# Altium PCB TX_custom.PcbDoc (part 1 of 2)
Units mil, origin at the board's own origin, x right, y up, seen from the top; angles counter-clockwise.
Board outline 2165.35 x 2559.06 mil, 4 copper layers (Top Layer, Signal Layer 1, Internal Plane 1, Bottom Layer), stack 60.752 mil thick; 202 components, 136 nets, 640 pads, 248 vias.
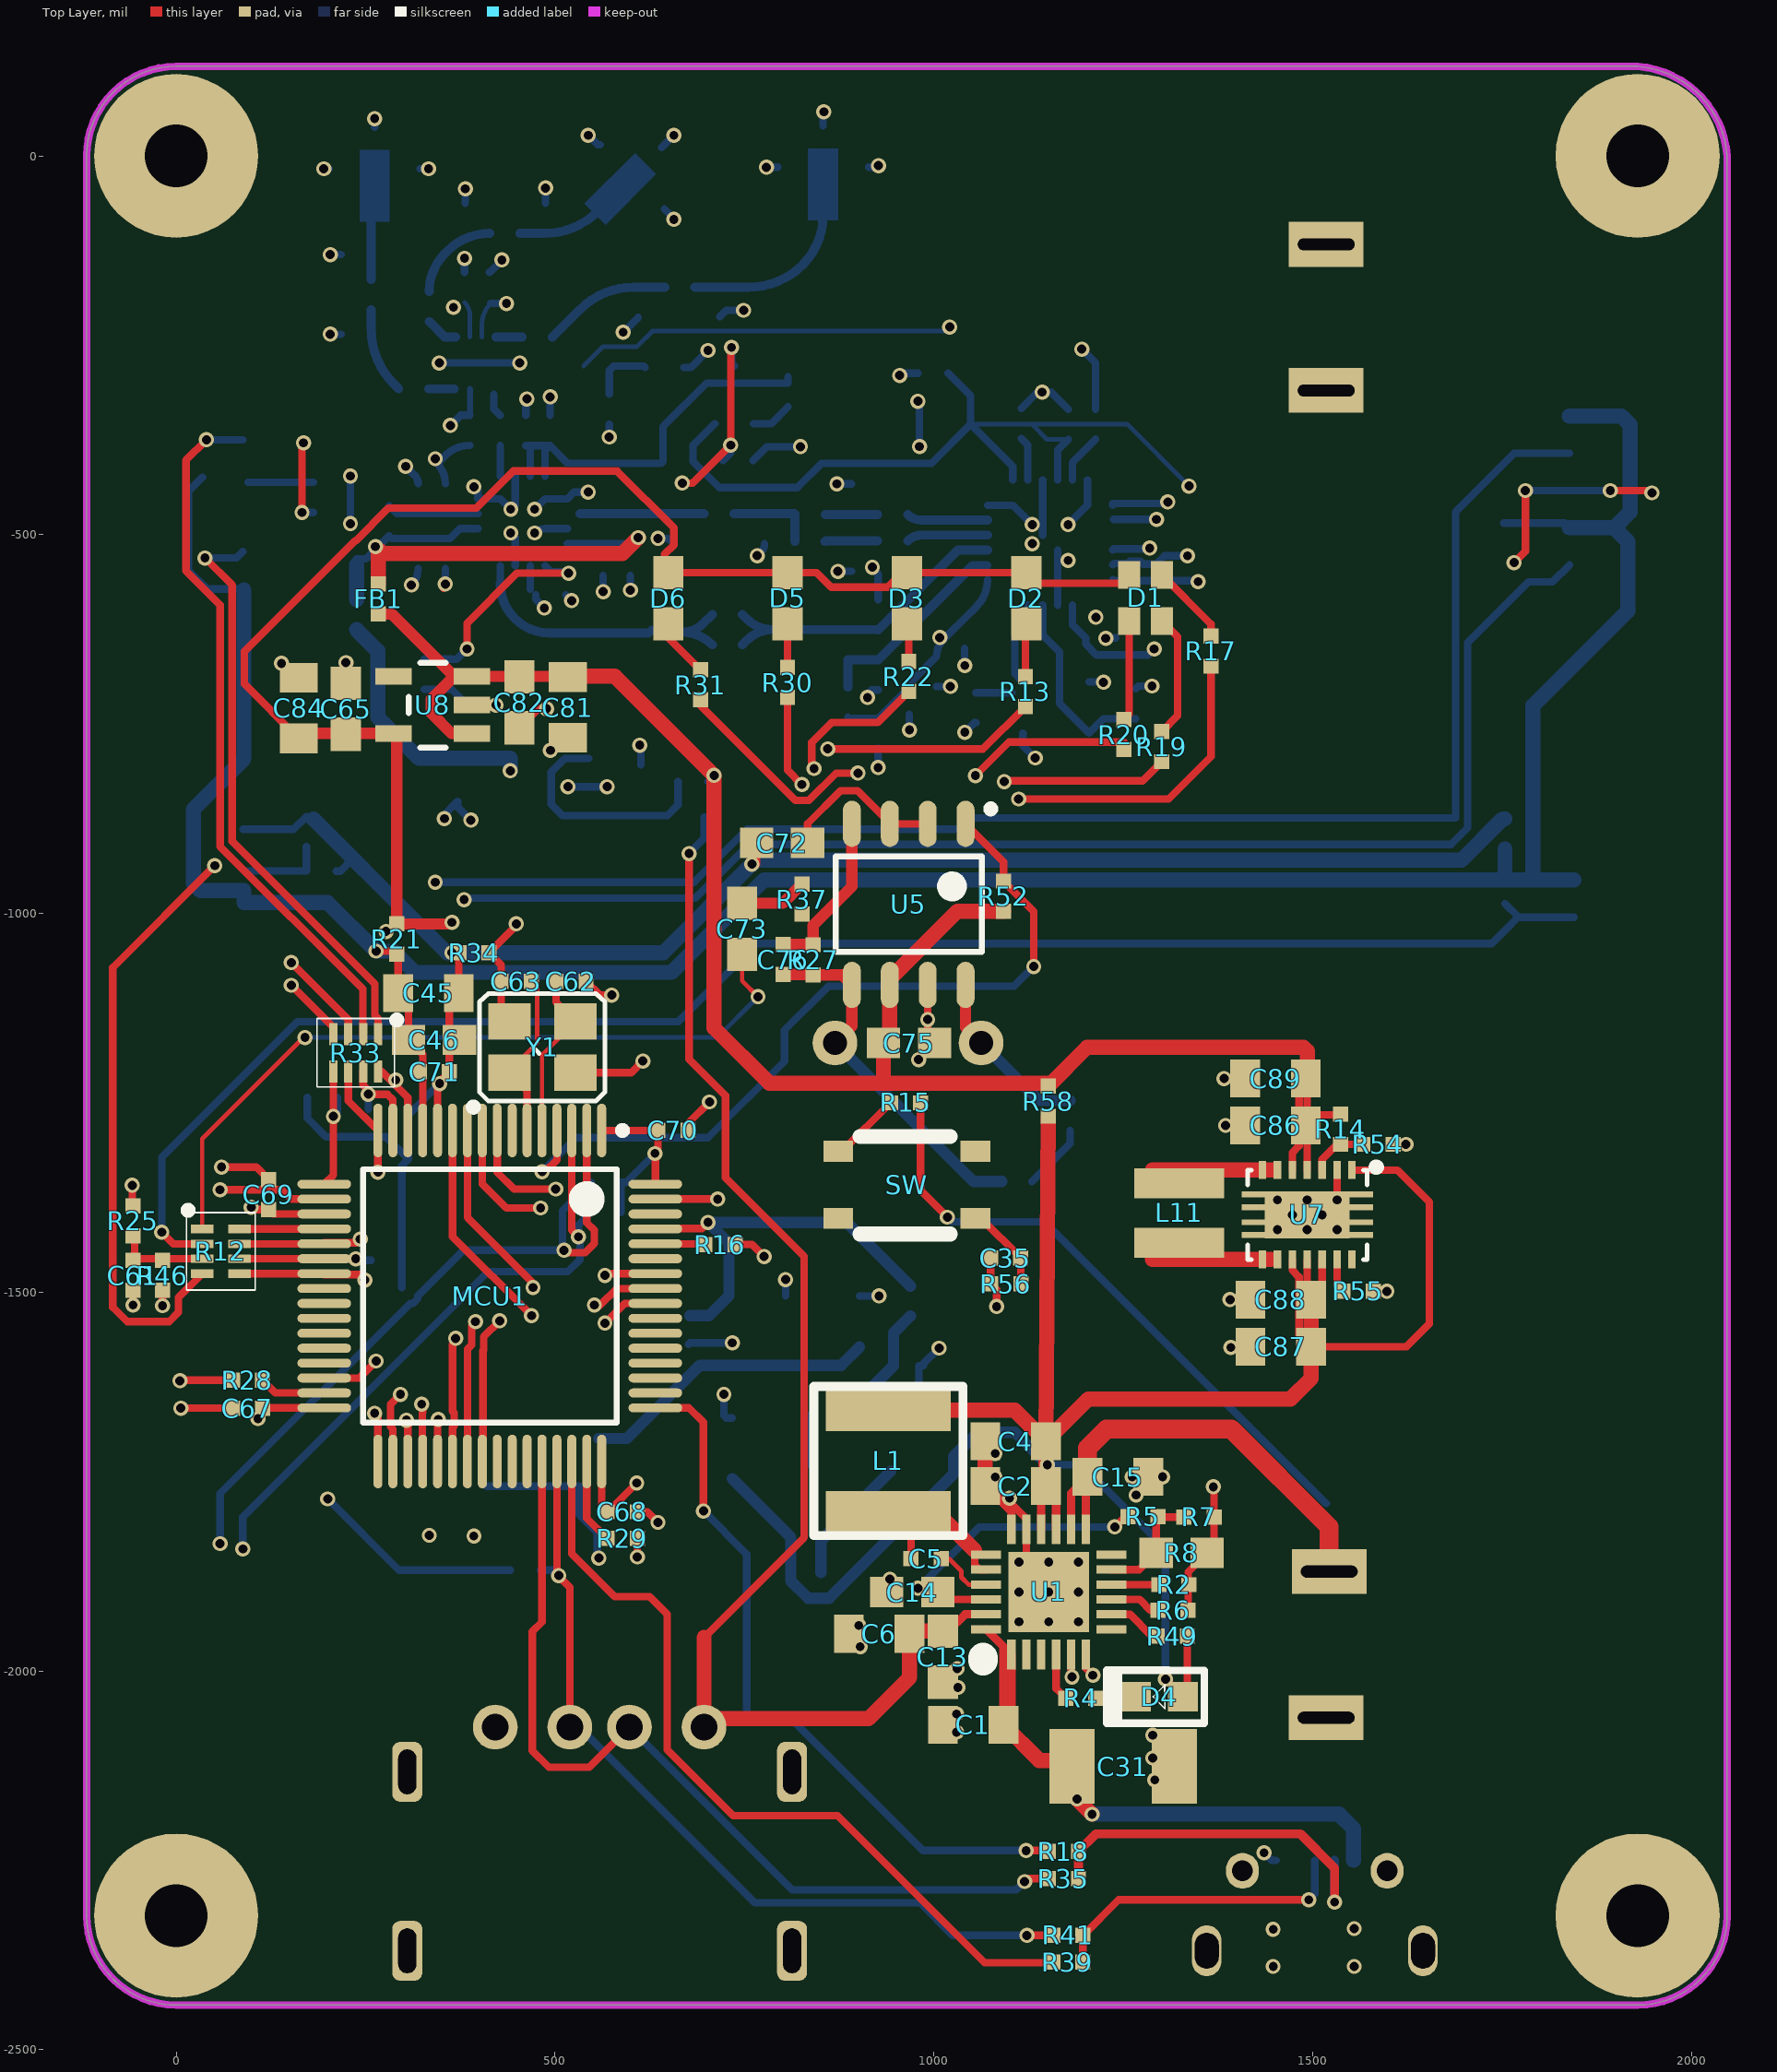
[diagram p0: Top Layer view]
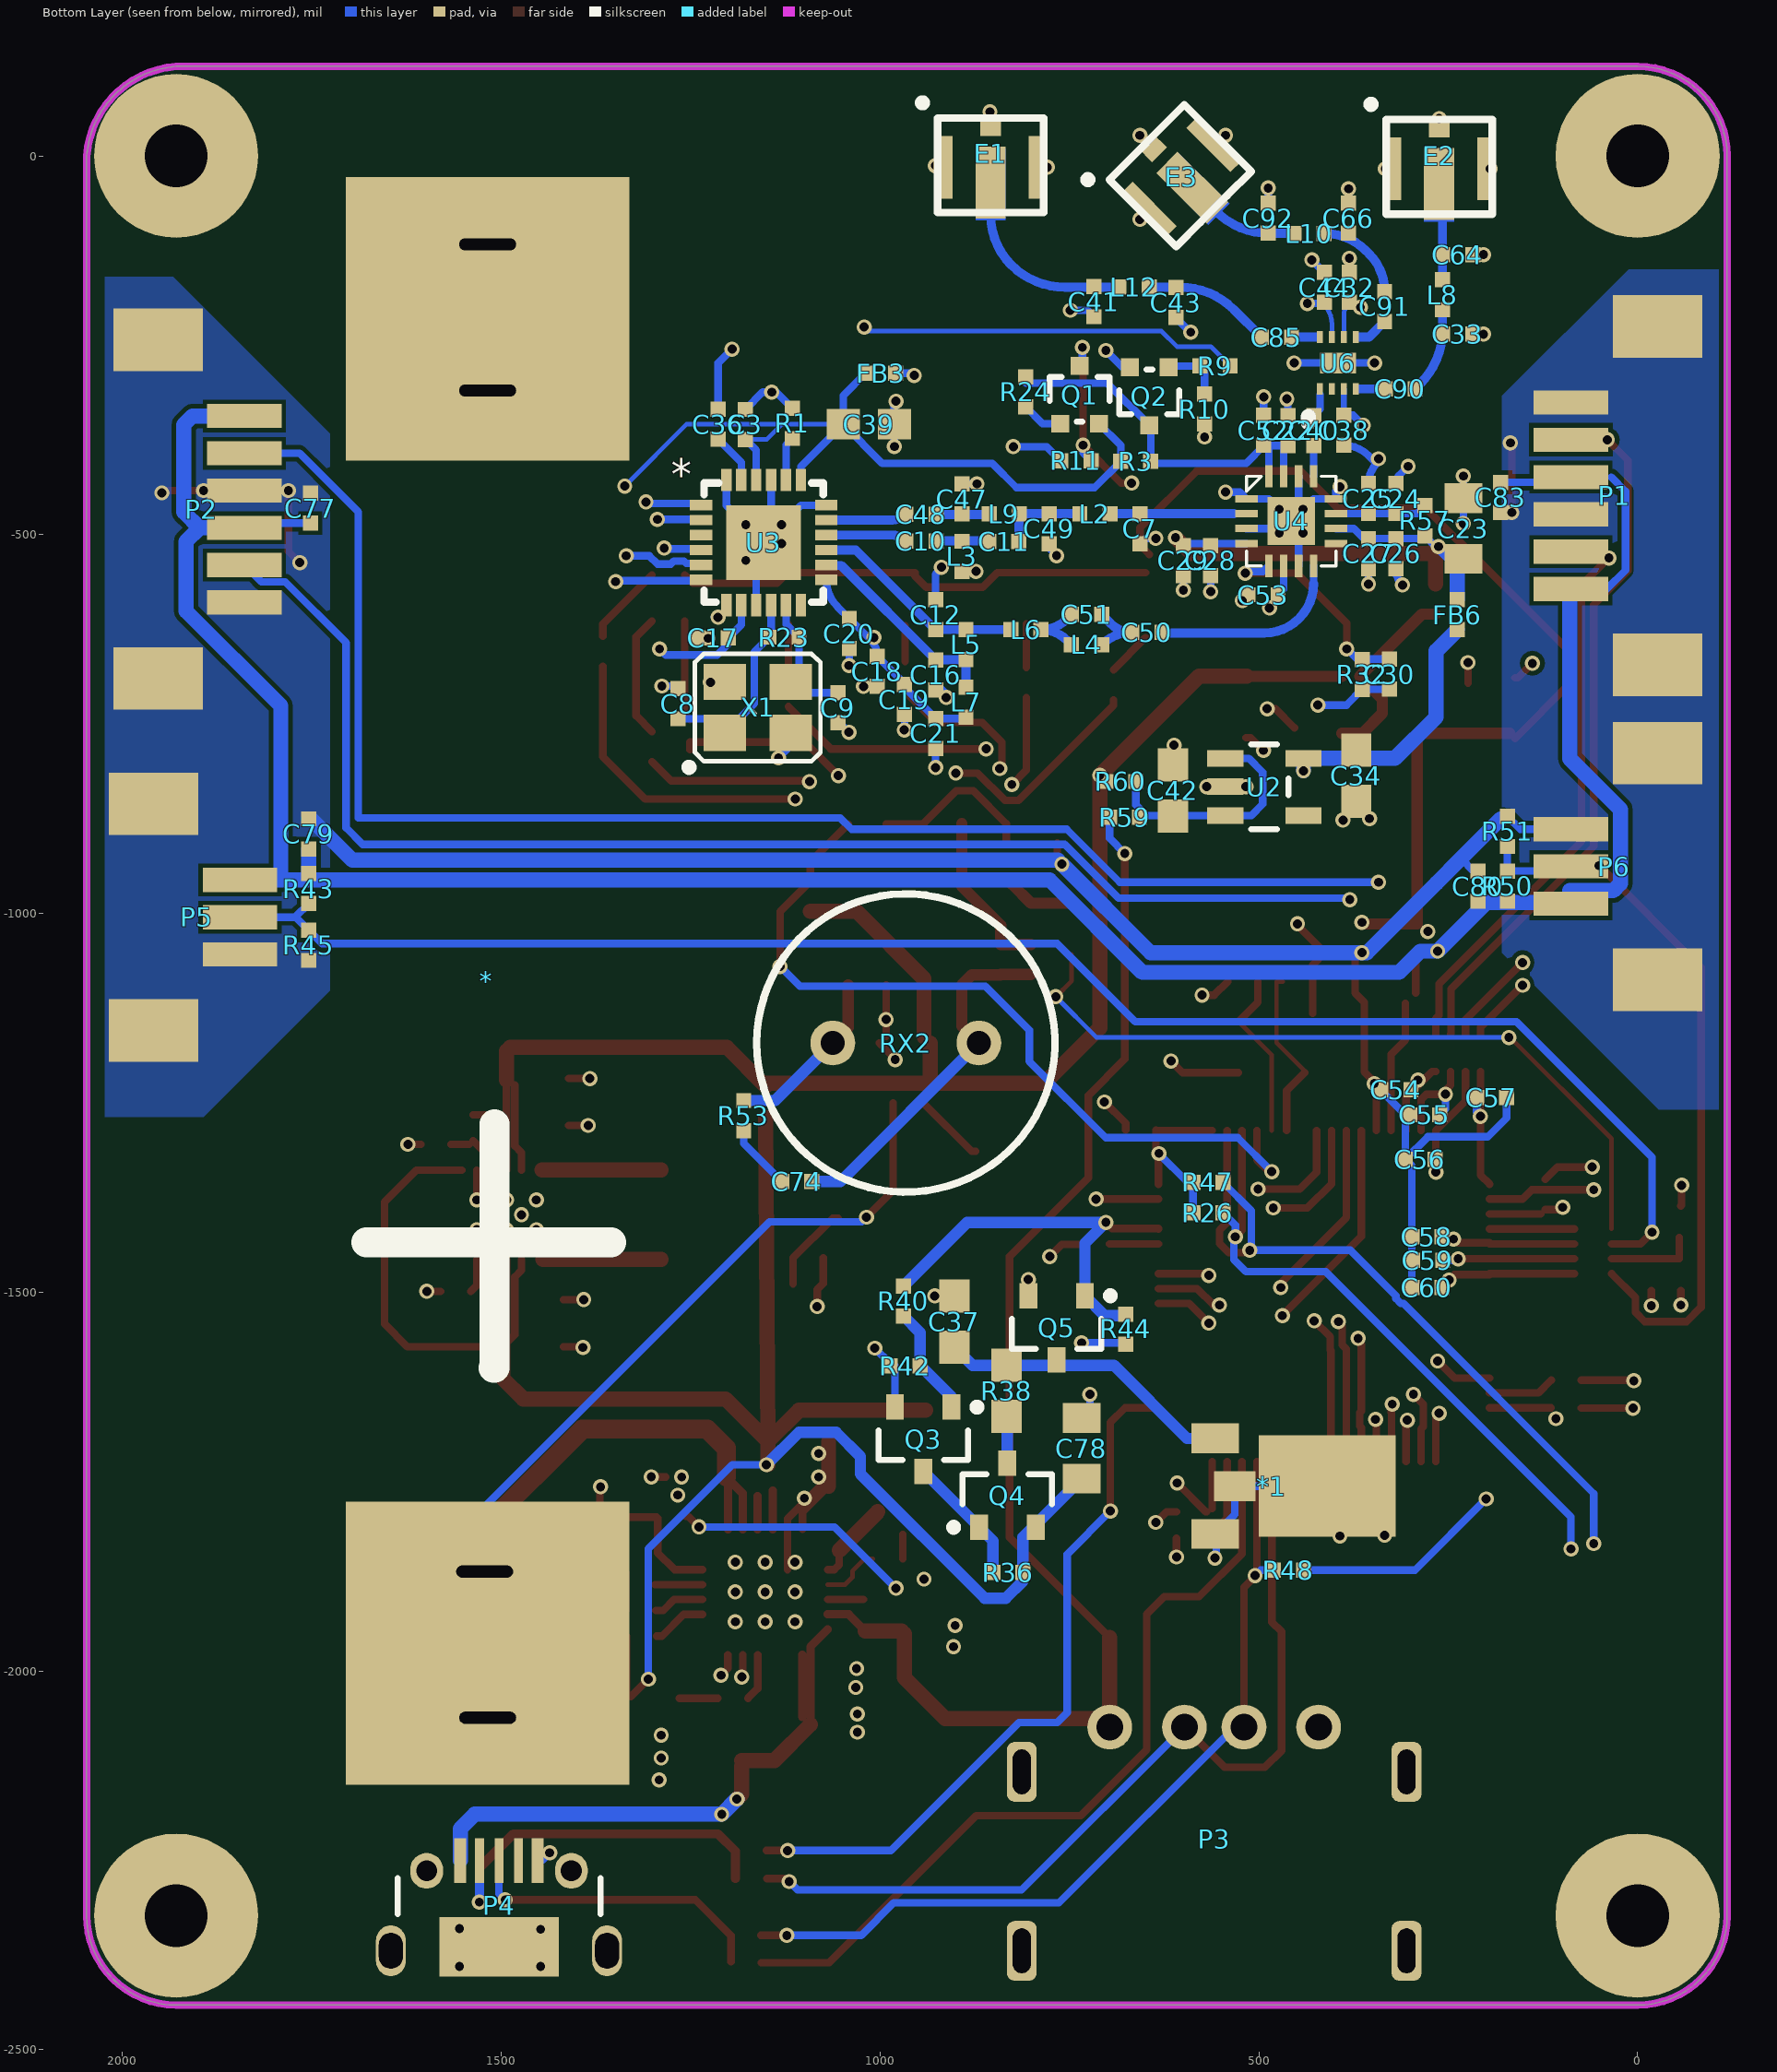
[diagram p1: Bottom Layer view, seen from below]
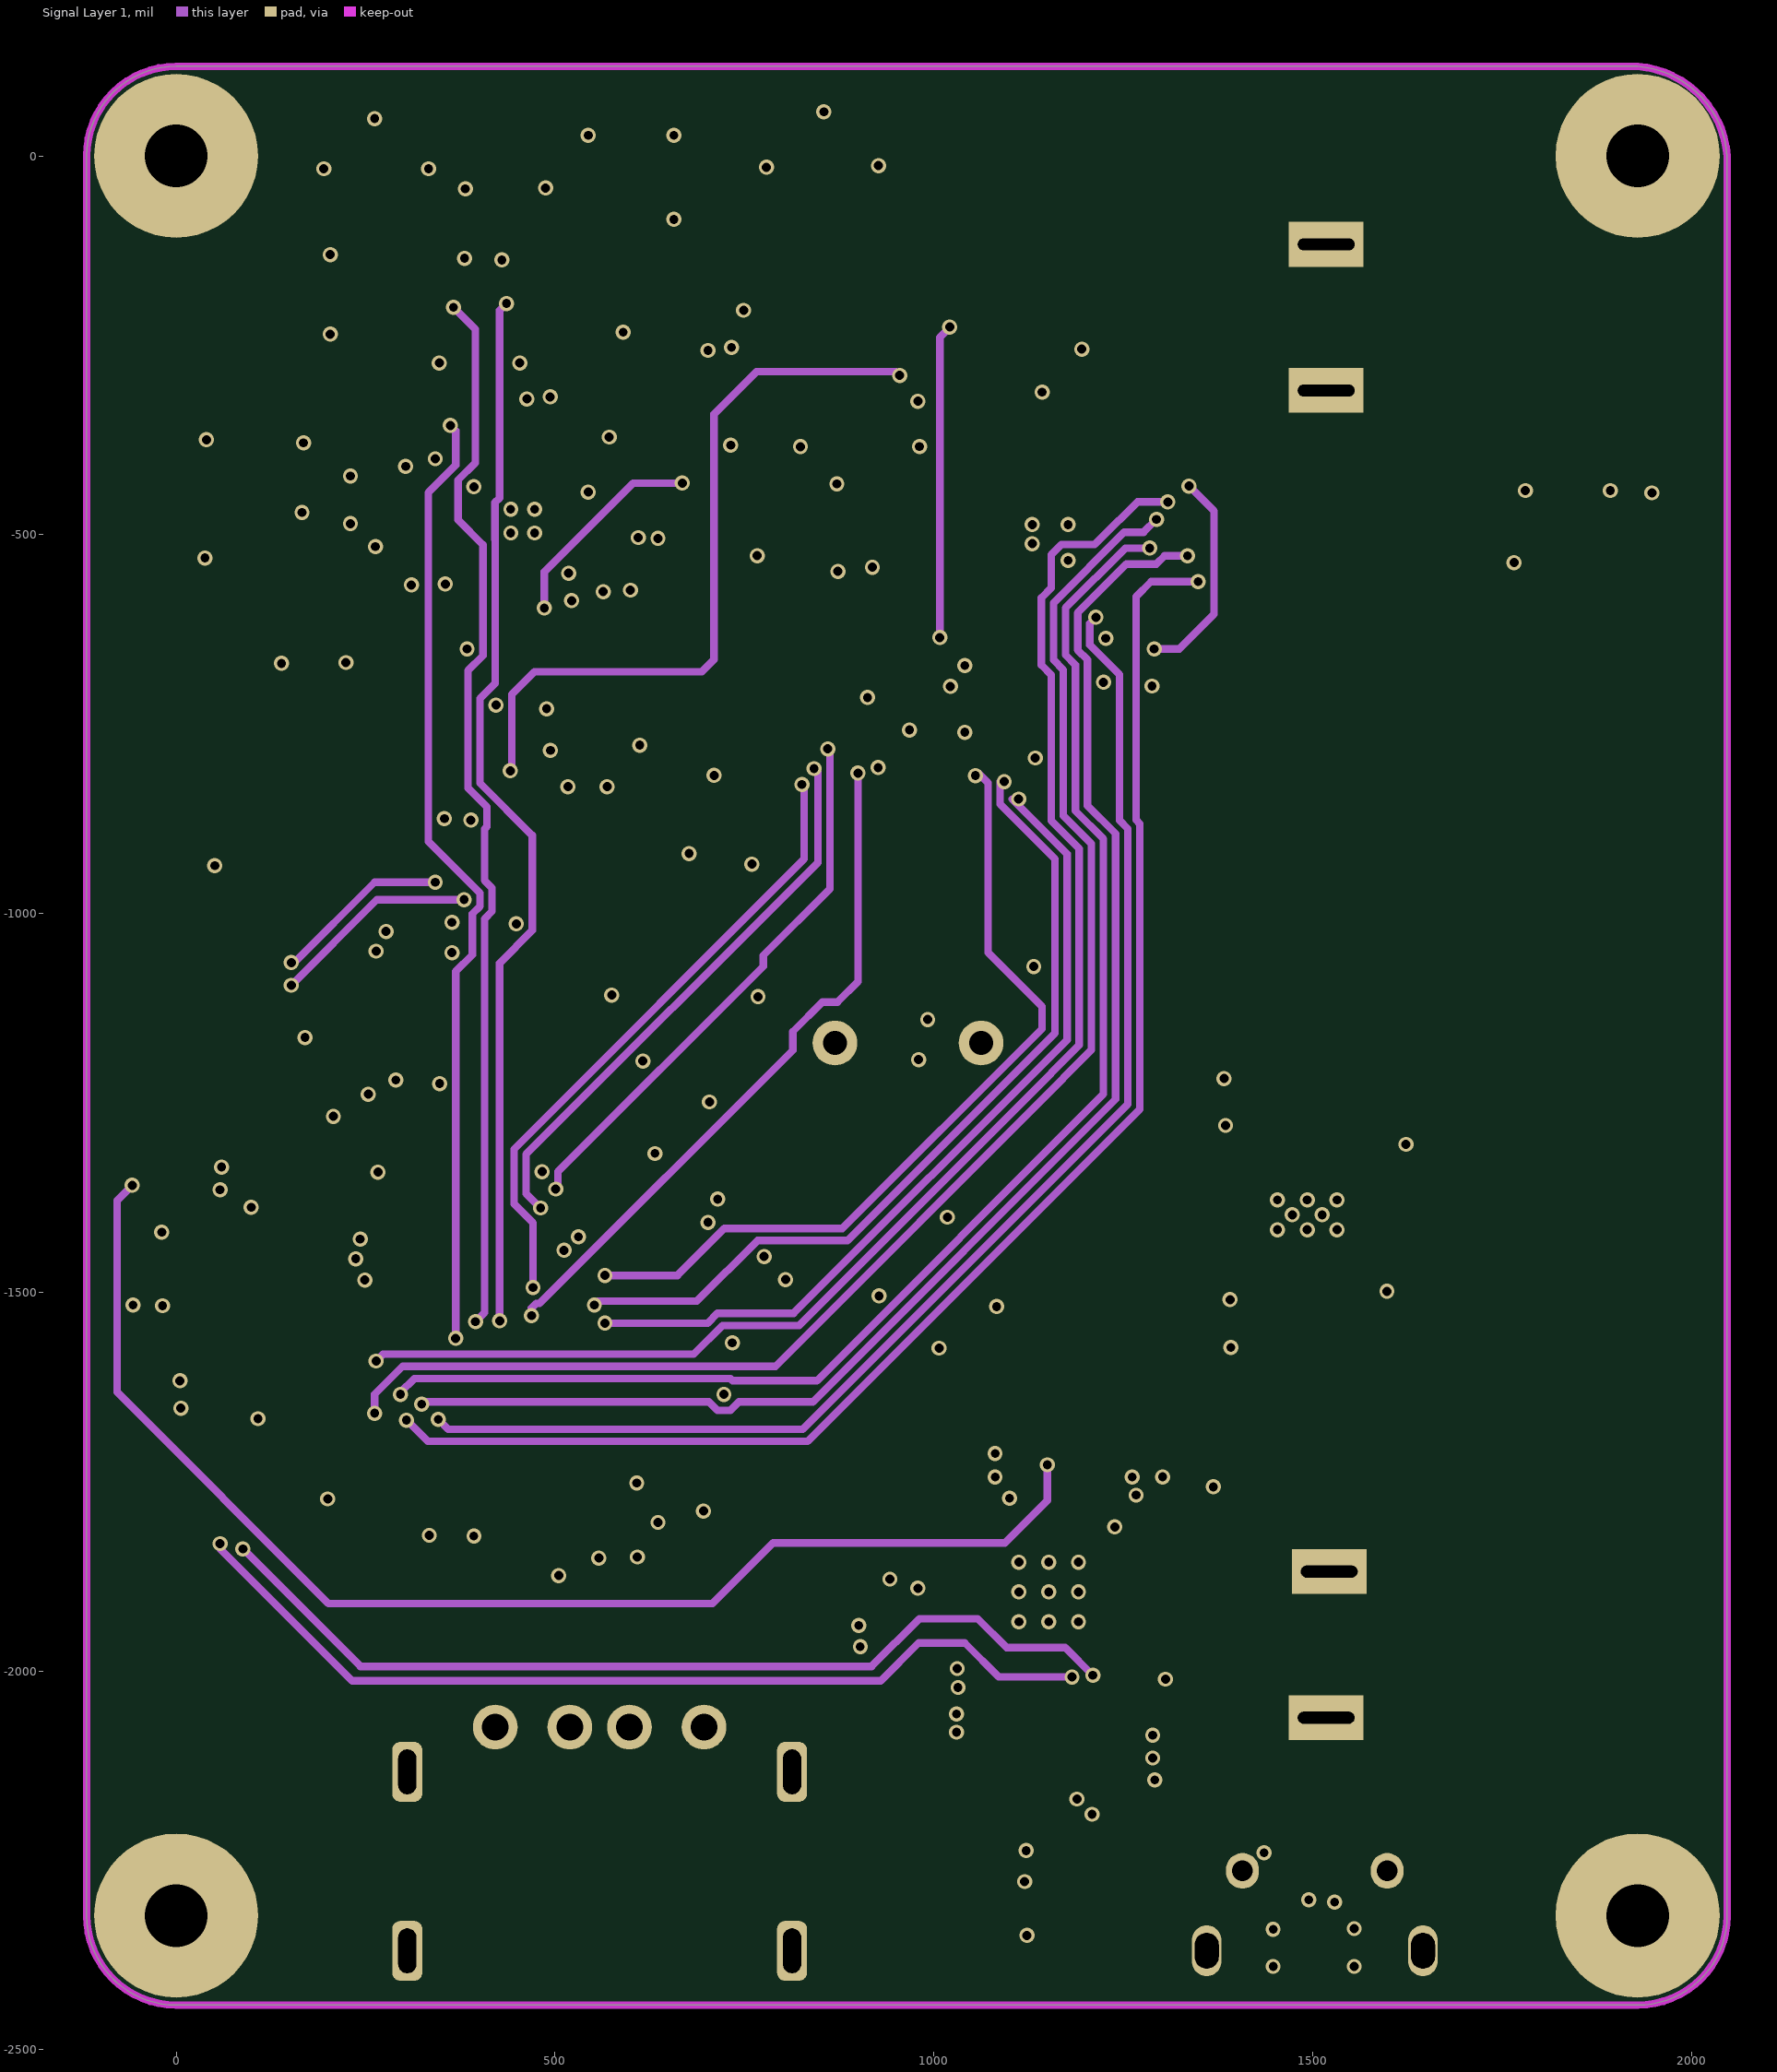
[diagram p2: Signal Layer 1]
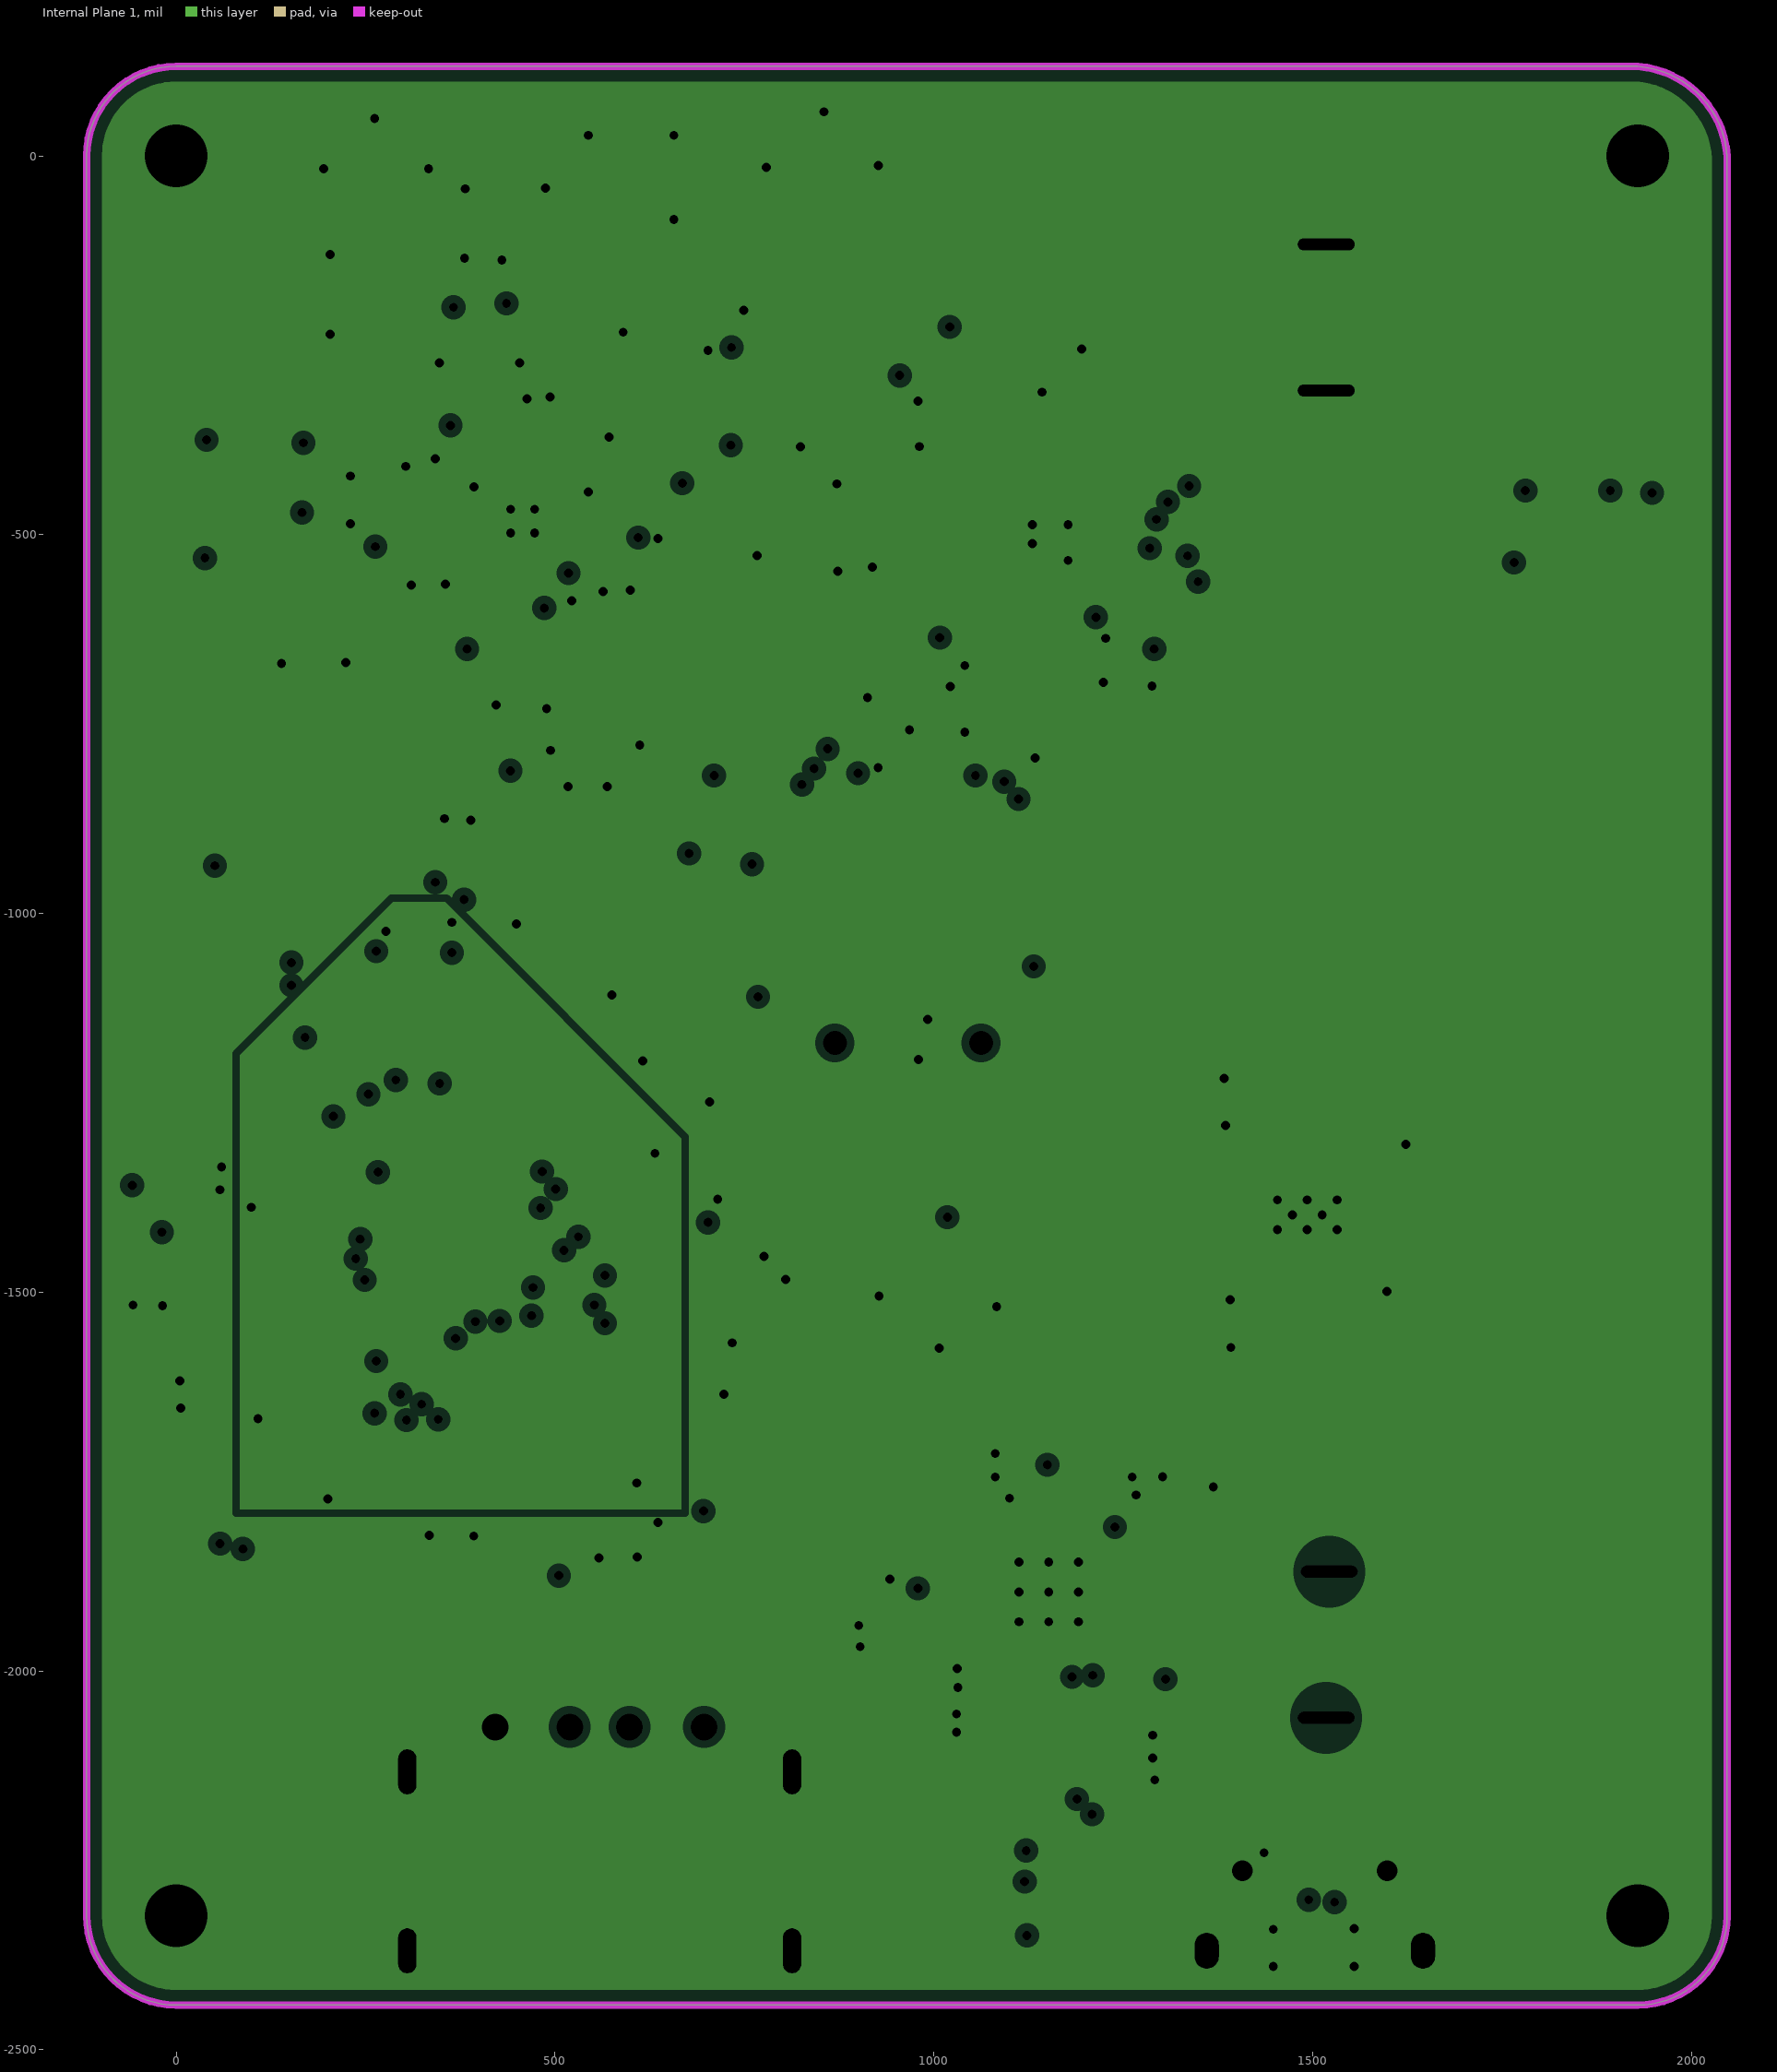
[diagram p3: Internal Plane 1, clearances drawn from the general rule]

## Layer stack, top to bottom
Top Solder: solder mask 0.4, Solder Resist, Dk 3.5
Top Layer: signal copper 1.4
Dielectric1: prepreg 7.874, FR-4, Dk 4.5
Signal Layer 1: signal copper 1.4169
Dielectric 2: core 39.3701, Dk 4.2
Internal Plane 1: plane copper 1.4169, net (Multiple Nets)
Dielectric 3: prepreg 7.874, Dk 4.2
Bottom Layer: signal copper 1.4
Bottom Solder: solder mask 0.4, Solder Resist, Dk 3.5

## Board outline
-118.11,-2322.83 ccw(c0,-2322.83) 0,-2440.94 1929.13,-2440.94 ccw(c1929.13,-2322.83) 2047.24,-2322.83 2047.24,0 ccw(c1919.29,-9.84) 1929.13,118.11 0,118.11 ccw(c0,0) -118.11,0

## Design rules (kind name [scope] priority, off if disabled: settings)
Clearance [All] p1: gap=6
HoleSize [All] p1: absolutevalues=TRUE maxlimit=150 minlimit=1 maxpercent=80.000 minpercent=20.000
MatchedLengths [InNetClass('BK5811_SPI')] p1 off: tolerance=100 checknetsindiffpair=TRUE checkdiffpairvsdiffpair=TRUE checkothers=TRUE
MinimumSolderMaskSliver [All] p1 off: minsoldermaskwidth=10
PlaneClearance [All] p1: clearance=10
PlaneConnect [All] p1: planeconnectstyle=Direct reliefexpansion=20 reliefentries=4 reliefconductorwidth=10 reliefairgap=10
PolygonConnect [All] p1: connectstyle=Direct reliefconductorwidth=10 reliefentries=4 polygonreliefangle="90 Angle" airgapwidth=10
RoomDefinition TX_custom [InComponentClass('TX_custom')] p1 off: confinementstyle=ConfineIn formatcopy=TRUE lockcomponents=FALSE outline 2092.28,529.33 21554.28,529.33 21554.28,1178.33 2092.28,1178.33
RoomDefinition BK5811 [InComponentClass('BK5811')] p2 off: confinementstyle=ConfineIn formatcopy=TRUE lockcomponents=FALSE outline 2092.28,-2384.67 4390,-2384.67 4390,-473 2092.28,-473
RoomDefinition BQ24295 [InComponentClass('BQ24295')] p3 off: confinementstyle=ConfineIn formatcopy=TRUE lockcomponents=FALSE outline -6579.72,-2242.59 -5271.19,-2242.59 -5271.19,-702.67 -6579.72,-702.67
RoomDefinition FEM [InComponentClass('FEM')] p4 off: confinementstyle=ConfineIn formatcopy=TRUE lockcomponents=FALSE outline -14900.72,-417.67 -16385.72,-417.67 -16385.72,-1562.67 -14900.72,-1562.67
RoutingVias [All] p1: holewidth=28 width=50 viastyle="Through Hole" minholewidth=12 minwidth=20 maxholewidth=28 maxwidth=50
SilkToSilkClearance [All] p1 off: silktosilkclearance=10
SilkToSolderMaskClearance [IsPad] p1 off: minsilkscreentomaskgap=10 clearancetoexposedcopper=TRUE
SolderMaskExpansion [All] p1: expansion=4
UnpouredPolygon [All] p1: allowunpoured=FALSE
Width [All] p1: maxlimit=80 minlimit=6 preferedwidth=10
23 further rules are at their usual default settings.

## Classes and differential pairs
net class BK5811_SPI: CE CSN IRQ MISO MOSI SCK
component class BQ24295: * C1 C2 C4 C5 C6 C13 C14 C15 C31 D4 L1 P3 R2 R4 R5 R6 R7 R8 R49 R58 U1
component class BK5811: C3 C7 C8 C9 C10 C11 C12 C16 C17 C18 C19 C20 C21 C36 C39 C47 C48 C49 C50 C51 L2 L3 L4 L5 L6 L7 L9 R1 R23 U3 X1
component class FEM: C22 C23 C24 C25 C26 C27 C28 C29 C30 C32 C33 C34 C38 C40 C41 C42 C43 C44 C52 C53 C64 C66 C85 C90 C91 C92 E1 E2 E3 FB1 FB3 FB6 L8 L10 L12 Q1 Q2 R3 R9 R10 R11 R24 R32 R57 R59 R60 U2 U4 U6
component class TX_custom: *1 C35 C37 C45 C46 C54 C55 C56 C57 C58 C59 C60 C61 C62 C63 C65 C67 C68 C69 C70 C71 C72 C73 C74 C75 C76 C77 C78 C79 C80 C81 C82 C83 C84 C86 C87 C88 C89 D1 D2 D3 D5 D6 L11 MCU1 P1 P2 P4 P5 P6 Q3 Q4 Q5 R12 R13 R14 R15 R16 R17 R18 R19 R20 R21 R22 R25 R26 R27 R28 R29 R30 R31 R33 R34 R35 R36 R37 R38 R39 R40 R41 R42 R43 R44 R45 R46 R47 R48 R50 R51 R52 R53 R54 R55 R56 RX2 SW U5 U7 U8 Y1
net class ANT[1..3]: ANT1 ANT2 ANT3

## Components (designator, comment, footprint, x,y, rotation, side; value= is the part's Value field where it differs from the comment)
* "14500Bat" 14500 1518,-105 r270 bottom
*1 "ViberatorMotor" VibratorMotor 528,-1756 r180 bottom
C1 "1uF" 0805 1052,-2070.83 r180 top
C2 "22uF" 0805 1108,-1755.83 r180 top
C3 "0.1uF" 0402 1177.62,-354.38 r270 bottom
C4 "22uF" 0805 1108,-1696.83 r180 top
C5 "47nF" 0402 990,-1851.83 r180 top
C6 "22uF" 0805 928,-1950.83 r180 top
C7 "NC" 0402 656.62,-492.38 r90 bottom
C8 "Cap" 0402 1266.62,-723.38 r90 bottom
C9 "Cap" 0402 1055.62,-728.38 r270 bottom
C10 "1pF" 0402 946.03,-508.35 r180 bottom
C11 "0.6pF" 0402 836.43,-509.06 r0 bottom
C12 "0.5pF" 0402 926.62,-605.38 r270 bottom
C13 "1uF" 0603 1012,-1980.83 r270 top
C14 "4.7uF" 0603 972,-1895.83 r180 top
C15 "22uF" 0805 1243,-1743.83 r0 top
C16 "0.5pF" 0402 926.62,-685.38 r90 bottom
C17 "0.1uF" 0402 1220.62,-636.38 r180 bottom
C18 "NC" 0402 1003.62,-680.38 r270 bottom
C19 "NC" 0402 967.62,-717.38 r270 bottom
C20 "NC" 0402 1040.62,-630.38 r270 bottom
C21 "1.2pF" 0402 926.62,-762.38 r270 bottom
C22 "47pF" 0402 461.65,-362.46 r270 bottom
C23 "4.7uF" 0805 230,-491.83 r270 bottom
C24 "47pF" 0402 319.35,-452.21 r270 bottom
C25 "0.1uF" 0402 355.35,-452.21 r270 bottom
C26 "47pF" 0402 319.35,-525.21 r90 bottom
C27 "0.1uF" 0402 355.35,-525.21 r90 bottom
C28 "0.1uF" 0402 563.59,-534.3 r90 bottom
C29 "47pF" 0402 599.59,-534.3 r90 bottom
C30 "100pF" 0402 327.62,-684.38 r90 bottom
C31 "100uF" 1210 1250,-2125.83 r0 top
C32 "Cap" 0402 380.62,-173.38 r270 bottom
C33 "Cap" 0402 237.62,-235.38 r180 bottom
C34 "4.7uF" 0603 371.46,-818.46 r90 bottom
C35 "1uF" 0402 1095,-1454.67 r180 top
C36 "33nF" 0402 1213.62,-354.38 r90 bottom
C37 "0.1uF" 0603 902,-1539 r90 bottom
C38 "Cap" 0402 387.62,-362.38 r90 bottom
C39 "4.7uF" 0603 1014.62,-354.38 r0 bottom
C40 "10p" 0402 427.62,-362.38 r270 bottom
C41 "Cap" 0402 717.62,-192.38 r270 bottom
C42 "4.7uF" 0603 613.46,-837.46 r270 bottom
C43 "Cap" 0402 609.62,-193.38 r270 bottom
C44 "Cap" 0402 413.62,-173.38 r270 bottom
C45 "C" 0805 333,-1105 r0 top
C46 "C" 0603 340,-1167 r0 top
C47 "0.6pF" 0402 891.54,-452.95 r90 bottom
C48 "1pF" 0402 946.03,-473.35 r180 bottom
C49 "NC" 0402 776.62,-492.38 r90 bottom
C50 "0.5pF" 0402 648,-628.83 r180 bottom
C51 "0.5pF" 0402 727.62,-605.38 r180 bottom
C52 "47pF" 0402 493.65,-362.46 r90 bottom
C53 "47pF" 0402 494.62,-579.38 r180 bottom
C54 "0.1u*4" 0402 319,-1232.83 r0 bottom
C55 "1n" 0402 281,-1265.83 r0 bottom
C56 "1n" 0402 287,-1324.83 r0 bottom
C57 "1n" 0402 193,-1243 r180 bottom
C58 "1n" 0402 278,-1426.83 r0 bottom
C59 "1n" 0402 277,-1457.83 r0 bottom
C60 "1n" 0402 278,-1493.83 r0 bottom
C61 "0.1uF" 0402 -57,-1478 r90 top
C62 "22pF" 0402 521,-1089.83 r0 top
C63 "22pF" 0402 449,-1089.83 r180 top
C64 "Cap" 0402 237.62,-130.38 r180 bottom
C65 "C" 0603 224,-730 r90 top
C66 "Cap" 0402 381.62,-82.38 r90 bottom
C67 "0.1u*4" 0402 94,-1653 r0 top
C68 "1n" 0402 589,-1789.83 r180 top
C69 "1n" 0402 122,-1370.83 r270 top
C70 "1n" 0402 656,-1286 r180 top
C71 "0.1u" 0402 341,-1209 r180 top
C72 "1uF" 0603 800,-907 r180 top
C73 "1uF" 0603 747,-1020 r270 top
C74 "2.2nF" 0402 1110,-1354 r180 bottom
C75 "1uF" 0603 967,-1171 r0 top
C76 "4.7nF/NC" 0402 801,-1061 r90 top
C77 "0.1u" 0402 1752,-464.83 r270 bottom
C78 "C" 0805 734,-1706 r90 bottom
C79 "0.1u" 0402 1754,-894.83 r270 bottom
C80 "0.1u" 0402 211,-964 r270 bottom
C81 "C" 0805 517,-728 r270 top
C82 "C" 0603 453,-721 r270 top
C83 "0.1u" 0402 181,-451 r90 bottom
C84 "C" 0805 162,-729 r90 top
C85 "Cap" 0402 476.62,-239.38 r0 bottom
C86 "1uF" 0805 1451,-1279.83 r180 top
C87 "1uF" 0805 1458,-1571.83 r180 top
C88 "22uF" 0805 1458,-1509.83 r180 top
C89 "22uF" 0805 1451,-1217.83 r180 top
C90 "Cap" 0402 313.62,-307.38 r180 bottom
C91 "Cap" 0402 334,-199 r90 bottom
C92 "Cap" 0402 487.62,-82.38 r90 bottom
D1 "LEDx3" LC-0603_RX2 1279.53,-583.58 r180 top
D2 "LED0" 0603LED 1122.05,-583.58 r270 top
D3 "LED0" 0603LED 964.57,-583.58 r270 top
D4 "LED" LED0603 1298,-2034 r180 top
D5 "LED0" 0603LED 807.09,-583.58 r270 top
D6 "LED0" 0603LED 649.61,-583.58 r270 top
E1 "Antenna" IPEX 854,-15 r180 bottom
E2 "Antenna" IPEX 262,-17 r180 bottom
E3 "Antenna" IPEX 602,-27.83 r135 bottom
FB1 "NC" 0402 267,-584.83 r270 top
FB3 "Res2" 0402 999,-286.83 r0 bottom
FB6 "Res2" 0402 238,-605.83 r90 bottom
L1 "2.2uH" L50xx 940,-1722.83 r90 top
L2 "0R/10P" 0402 716.62,-472.38 r180 bottom
L3 "2nH" 0402 891.54,-528.74 r90 bottom
L4 "0.5pF" 0402 727.62,-645.38 r180 bottom
L5 "1nH" 0402 886.62,-645.38 r90 bottom
L6 "1.5nH" 0402 807.62,-625.38 r180 bottom
L7 "1nH" 0402 886.62,-721.38 r90 bottom
L8 "Inductor" 0402 257.62,-183.38 r90 bottom
L9 "2nH" 0402 836.43,-472.64 r180 bottom
L10 "Inductor" 0402 433.62,-102.38 r0 bottom
L11 "2.2uH" L3015 1324,-1434.83 r90 top
L12 "Inductor" 0402 664.62,-173.38 r0 bottom
MCU1 "STM32F103R8T6" LQFP64_N 414,-1505 r270 top
P1 "stick1" "WFRSM125 - 6P" 88,-424 r90 bottom
P2 "stick2" "WFRSM125 - 6P" 1839,-491 r270 bottom
P3 "USB_TYPE_A_SOCKET" USB_TYPE_A_SOCKET 559,-2133.11 r180 bottom
P4 "SWD_MicroUSB" MICRO-YZX 1503,-2480.32 r180 bottom
P5 "3PSocket_T" "WFRSM125 - 3P" 1902,-1005 r270 bottom
P6 "3PSocket_T" "WFRSM125 - 3P" 31,-938 r90 bottom
Q1 "PNP" LC-SOT-323(SC-70) 736.62,-315.38 r270 bottom
Q2 "NPN" LC-SOT-323(SC-70) 644.62,-317.38 r90 bottom
Q3 "NPN" SOT-23B_L 943,-1694 r270 bottom
Q4 "PMOS" SOT-23B_L 832,-1768 r90 bottom
Q5 "NMOS" SOT-23B_L 767,-1547 r270 bottom
R1 "62K 1%" 0402 1115.62,-353.38 r90 bottom
R2 "160R" 0402 1317,-1886 r0 top
R3 "Res2" 0402 662.62,-403.38 r180 bottom
R4 "1k" 0402 1194,-2036 r0 top
R5 "5.25k" 0402 1276,-1796 r0 top
R6 "10k" 0402 1316,-1920 r180 top
R7 "31.2k" 0402 1350,-1797 r0 top
R8 "10k ntc" 0603 1327,-1844 r0 top
R9 "10k" 0402 557.62,-277.38 r0 bottom
R10 "10k" 0402 571.62,-334.38 r90 bottom
R11 "Res2" 0402 741.62,-402.38 r180 bottom
R12 "200R" 0402X4 59,-1446 r0 top
R13 "1k" 0402 1121,-707 r270 top
R14 "56k" 0402 1537.17,-1284.83 r270 top
R15 "200R" 0402 963,-1250 r180 top
R16 "10k" 0402 718,-1437 r180 top
R17 "1k" 0402 1366,-654 r90 top
R18 "0R/NC" 0402 1171,-2238 r0 top
R19 "1k" 0402 1301,-780 r90 top
R20 "1k" 0402 1251,-764 r90 top
R21 "FB" 0402 291,-1033.83 r90 top
R22 "1k" 0402 967,-687 r270 top
R23 "Res2" 0402 1126.62,-635.38 r0 bottom
R24 "Res2" 0402 807.62,-311.38 r270 bottom
R25 "4.7k" 0402 -57,-1406 r90 top
R26 "4.7k" 0402 567,-1395 r0 bottom
R27 "10k" 0402 841,-1061 r270 top
R28 "0R" 0402 94,-1616 r0 top
R29 "FB" 0402 589,-1824.83 r180 top
R30 "1k" 0402 807,-695 r270 top
R31 "1k" 0402 692,-698 r270 top
R32 "Res2" 0402 363.62,-684.38 r270 bottom
R33 "200R" 0402X4 237,-1184 r270 top
R34 "0R" 0402 393,-1051.83 r0 top
R35 "NC/0R" 0402 1171,-2274 r0 top
R36 "1k" 0402 831,-1870 r0 bottom
R37 "10k" 0402 826,-981 r270 top
R38 "5R" 0603 833,-1630 r270 bottom
R39 "0R/NC" 0402 1177,-2384 r180 top
R40 "10k" 0402 969,-1511.83 r90 bottom
R41 "NC/0R" 0402 1177,-2349 r0 top
R42 "10k" 0402 967,-1597 r180 bottom
R43 "10k" 0402 1754,-967 r270 bottom
R44 "10k" 0402 676,-1549 r90 bottom
R45 "10k" 0402 1754,-1042 r270 bottom
R46 "4.7k" 0402 -18,-1478 r90 top
R47 "4.7k" 0402 567,-1355 r0 bottom
R48 "NC/1.5k" 0402 461,-1866.83 r180 bottom
R49 "10k" 0402 1315,-1954 r180 top
R50 "10k" 0402 172,-964 r90 bottom
R51 "10k" 0402 172,-892 r90 bottom
R52 "10k" 0402 1092,-977 r270 top
R53 "20R" 0402 1180,-1267 r90 bottom
R54 "10k" 0402 1586.17,-1304.83 r0 top
R55 "10k" 0402 1560,-1498.83 r0 top
R56 "10k" 0402 1095,-1488.83 r0 top
R57 "0R" 0402 281,-481.83 r90 bottom
R58 "0R" 0402 1151,-1248 r90 top
R59 "NC" 0402 677,-872.83 r0 bottom
R60 "0R" 0402 682,-825.83 r0 bottom
RX2 "NC" sonar-10mm 966,-1171 r180 bottom
SW "SW-PB" SW3X4 964.57,-1358.27 r0 top
U1 "BQ24295" BQ24295 1151.67,-1895.72 r90 top
U2 "LP5907" SOT23-5 493.12,-832.74 r270 bottom
U3 "BK5811" BK5811 1153.62,-510.39 r180 bottom
U4 "SKY85703" QFN16-3x3 457.37,-482.13 r180 bottom
U5 "LM4871 / FM8002" SOIC8_39MM 967,-988 r270 top
U6 "SKY13417" SKY13317 395.62,-273.38 r90 bottom
U7 "TPS63020" TPS63020 1493,-1397.83 r180 top
U8 "RT9193-33_1_2" SOT23-5 339,-725 r90 top
X1 "16Mhz" OSCILLATOR-3.2X2.5 1161.62,-728.38 r180 bottom
Y1 "16Mhz" OSCILLATOR-3.2X2.5 483,-1176.83 r0 top

## Footprints (in the part's own frame and the unit in brackets; to place one, negate y for a bottom-side part, rotate by r counter-clockwise, add the part's x,y. Pads: shape width x height; smd on the part's side, far side on the other; paste and mask are expansions set on the pad)
0402 [mil] "0402-RES"
  rect 20x20 smd: 1(-19.69,0) 2(20,0)
0402X4 [mm]
  rect 0.75x0.28 smd: 1(-0.625,0.75) 2(-0.625,0.25) 3(-0.625,-0.25) 4(-0.625,-0.75) 5(0.625,-0.75) 6(0.625,-0.25) 7(0.625,0.25) 8(0.625,0.75)
  silkscreen extent -1.22,-1.3 1.15,1.5
0603 [mil] "0603-RES"
  rect 44x40 smd: 1(-33.46,0) 2(34,0)
0603LED [mil] "0603-RES"
  rect 44x40 smd: 1(-33.46,0) 2(34,0)
  body extent -30,-15 30,15, height 20
0805 [mil]
  rect 39.37x50 smd: 1(-40,0) 2(40,0)
  body extent -50,-30 50,30, height 31
1210 [mm]
  rect 1.52x2.5 smd: 1(-1.715,0) 2(1.715,0)
14500 [mm]
  rect 1.5x2.5 hole 0.4 slot 1.9 at 90 deg: 1(44.8,-0.1) 1(49.7,0) 2(0.3,0) 2(5.2,0)
  rect 9.5x9.5 smd: 1(47.2,0) 2(2.8,0)
  body extent 0,-7 50,6.94, height 13.99
BK5811 [mm]
  rect 2.5x2.5 smd: 0(0,0)
  rect 0.75x0.35 smd: 1(-2.1,1.25) 2(-2.1,0.75) 3(-2.1,0.25) 4(-2.1,-0.25) 5(-2.1,-0.75) 6(-2.1,-1.25) 13(2.1,-1.25) 14(2.1,-0.75) 15(2.1,-0.25) 16(2.1,0.25) 17(2.1,0.75) 18(2.1,1.25)
  rect 0.35x0.75 smd: 7(-1.25,-2.1) 8(-0.75,-2.1) 9(-0.25,-2.1) 10(0.25,-2.1) 11(0.75,-2.1) 12(1.25,-2.1) 19(1.25,2.1) 20(0.75,2.1) 21(0.25,2.1) 22(-0.25,2.1) 23(-0.75,2.1) 24(-1.25,2.1)
  silkscreen extent -2,-2 2,2
BQ24295 [mm]
  rect 2.7x2.7 smd: 0(0,0)
  rect 1x0.28 smd: 1(-2.1,1.25) 2(-2.1,0.75) 3(-2.1,0.25) 4(-2.1,-0.25) 5(-2.1,-0.75) 6(-2.1,-1.25) 13(2.1,-1.25) 14(2.1,-0.75) 15(2.1,-0.25) 16(2.1,0.25) 17(2.1,0.75) 18(2.1,1.25)
  rect 0.28x1 smd: 7(-1.25,-2.1) 8(-0.75,-2.1) 9(-0.25,-2.1) 10(0.25,-2.1) 11(0.75,-2.1) 12(1.25,-2.1) 19(1.25,2.1) 20(0.75,2.1) 21(0.25,2.1) 22(-0.25,2.1) 23(-0.75,2.1) 24(-1.25,2.1)
  silkscreen extent -2.3,2.2 -2.2,2.2, body extent -2,-2 2,2, height 0.9
IPEX [mil]
  rect 40x95 smd: 1(0,-20)
  rect 19.68x82.68 smd: 2(-60,0) 2(60,0)
  rect 27.56x27.56 smd: 2(0,55)
  Top Layer region: -20.01,25 19.99,25 19.99,-70 -20.01,-70
  silkscreen extent -95,-60 70,90
L50xx [mm]
  rect 1.4x4.2 smd: 1(1.7,0) 2(-1.7,0)
  silkscreen extent -2.5,-2.5 2.5,2.5
L3015 [mm]
  rect 1x3 smd: 1(0,0) 2(2,0)
LC-0603_RX2 [mm]
  rect 0.75x0.93 smd: 1(0.55,-0.77) 2(-0.55,-0.77) 3(-0.55,0.77) 4(0.55,0.77)
  body extent -0.8,-0.8 0.8,0.8, height 0.5
LC-SOT-323(SC-70) [mm]
  rect 0.6x0.6 smd: 1(0.97,-0.65) 2(0.97,0.65) 3(-0.97,0)
  silkscreen extent -0.6,-1 0.9,1, body extent -1.12,-1.1 1.12,1.1, height 1.1
LED0603 [mm] "LED0603"
  rect 1x1 smd: 1(-0.787,0) 2(0.787,0)
  silkscreen extent -1.5,-0.89 1.78,0.89
LQFP64_N [mm]
  oval 1.8x0.3 smd: 1(-5.55,3.75) 2(-5.55,3.25) 3(-5.55,2.75) 4(-5.55,2.25) 5(-5.55,1.75) 6(-5.55,1.25) 7(-5.55,0.75) 8(-5.55,0.25) 9(-5.55,-0.25) 10(-5.55,-0.75) 11(-5.55,-1.25) 12(-5.55,-1.75) 13(-5.55,-2.25) 14(-5.55,-2.75) 15(-5.55,-3.25) 16(-5.55,-3.75) 33(5.55,-3.75) 34(5.55,-3.25) 35(5.55,-2.75) 36(5.55,-2.25) 37(5.55,-1.75) 38(5.55,-1.25) 39(5.55,-0.75) 40(5.55,-0.25) 41(5.55,0.25) 42(5.55,0.75) 43(5.55,1.25) 44(5.55,1.75) 45(5.55,2.25) 46(5.55,2.75) 47(5.55,3.25) 48(5.55,3.75)
  oval 0.3x1.8 smd: 17(-3.75,-5.55) 18(-3.25,-5.55) 19(-2.75,-5.55) 20(-2.25,-5.55) 21(-1.75,-5.55) 22(-1.25,-5.55) 23(-0.75,-5.55) 24(-0.25,-5.55) 25(0.25,-5.55) 26(0.75,-5.55) 27(1.25,-5.55) 28(1.75,-5.55) 29(2.25,-5.55) 30(2.75,-5.55) 31(3.25,-5.55) 32(3.75,-5.55) 49(3.75,5.55) 50(3.25,5.55) 51(2.75,5.55) 52(2.25,5.55) 53(1.75,5.55) 54(1.25,5.55) 55(0.75,5.55) 56(0.25,5.55) 57(-0.25,5.55) 58(-0.75,5.55) 59(-1.25,5.55) 60(-1.75,5.55) 61(-2.25,5.55) 62(-2.75,5.55) 63(-3.25,5.55) 64(-3.75,5.55)
  silkscreen extent -5.67,-4.25 4.25,4.58
MICRO-YZX [mm]
  rect 0.4x1.5 smd: 1(-1.3,5.85) 5(1.3,5.85)
  rect 0.3x1.5 smd: 2(-0.65,5.85) 3(0,5.85) 4(0.65,5.85)
  oval 1x1.7 hole 0.8 slot 1.2 at 90 deg: 5(-3.625,2.82) 5(3.625,2.82)
  oval 1.1x1.2 hole 0.7: 5(-2.425,5.5) 5(2.425,5.5)
  rect 4x2 smd: 5(0,2.95)
  silkscreen extent -3.4,4.05 3.4,5.25, body extent -4.02,0.33 3.98,5.93, height 2.6
OSCILLATOR-3.2X2.5 [mil] "OSCILLATOR-3.2X2.5"
  rect 56x48 smd: 1(-43.31,-33.46) 2(44,-33.46) 3(44,34) 4(-43.31,34)
  silkscreen extent -95,-83 83,71
QFN16-3x3 [mm]
  rect 1.6x1.6 smd: 0(0,0)
  rect 0.75x0.25 smd: 1(-1.5,0.75) 2(-1.5,0.25) 3(-1.5,-0.25) 4(-1.5,-0.75) 9(1.5,-0.75) 10(1.5,-0.25) 11(1.5,0.25) 12(1.5,0.75)
  rect 0.25x0.75 smd: 5(-0.75,-1.5) 6(-0.25,-1.5) 7(0.25,-1.5) 8(0.75,-1.5) 13(0.75,1.5) 14(0.25,1.5) 15(-0.25,1.5) 16(-0.75,1.5)
  silkscreen extent -1.5,-1.5 1.5,1.5, body extent -1.5,-1.5 1.5,1.5, height 0.55
SKY13317 [mm]
  rect 0.7x1.2 smd: 0(0,0)
  rect 0.4x0.2 smd: 1(-0.87,0.6) 2(-0.87,0.2) 3(-0.87,-0.2) 4(-0.87,-0.6) 5(0.87,-0.6) 6(0.87,-0.2) 7(0.87,0.2) 8(0.87,0.6)
  silkscreen extent -2,1 -1.8,1, body extent -0.75,-0.75 0.75,0.75, height 0.45
SOIC8_39MM [mm]
  oval 1.55x0.6 smd: 1(-2.7,1.905) 2(-2.7,0.635) 3(-2.7,-0.635) 4(-2.7,-1.905) 5(2.7,-1.905) 6(2.7,-0.635) 7(2.7,0.635) 8(2.7,1.905)
  silkscreen extent -3.32,-2.45 1.6,2.88
sonar-10mm [mm]
  round 1.5 hole 0.8: 1(-2.45,0) 2(2.45,0)
  silkscreen extent -5,-5 5,5
SOT23-5 [mil] "SOT23-5"
  rect 22x48 smd: 1(-37.4,-51.19) 2(0,-51.19) 3(38,-51.19) 4(38,52) 5(-37.4,52)
  silkscreen extent -56,-17 56,32
SOT-23B_L [mm] "SOT23, 3-Leads, Body 2.9x1.3mm, Pitch 0.95mm, Lead Span 2.4mm, IPC High Density"
  rect 0.85x0.6 smd: 1(-1.075,0.95) 2(-1.075,-0.95) 3(1.075,0)
  silkscreen extent -1.2,-1.5 0.7,1.92, body extent -0.7,-1.5 0.7,1.5, height 1.14
SW3X4 [mm]
  rect 1x0.7 smd: 1(-2.3,1.125) 2(2.3,-1.125) 3(2.3,1.125) 4(-2.3,-1.125)
  silkscreen extent -1.58,-1.65 1.45,1.63, body extent -2,-1.5 2,1.5, height 2.6
TPS63020 [mm]
  rect 0.8x0.2 smd: 0(-1.8,-0.68) 0(-1.8,-0.25) 0(-1.8,0.25) 0(-1.8,0.68) 0(1.8,-0.68) 0(1.8,-0.25) 0(1.8,0.25) 0(1.8,0.68)
  rect 2.85x1.58 smd: 0(0,0)
  rect 0.25x0.6 smd: 1(-1.5,-1.5) 2(-1,-1.5) 3(-0.5,-1.5) 4(0,-1.5) 5(0.5,-1.5) 6(1,-1.5) 7(1.5,-1.5) 8(1.5,1.5) 9(1,1.5) 10(0.5,1.5) 11(0,1.5) 12(-0.5,1.5) 13(-1,1.5) 14(-1.5,1.5)
  silkscreen extent -2.32,-1.6 2,1.5, body extent -2,-1.5 2,1.5, height 1
USB_TYPE_A_SOCKET [mm]
  rrect50% 1x2 hole 0.6 slot 1.5 at 90 deg: 0(-6.45,-6) 0(-6.45,0) 0(6.45,-6) 0(6.45,0)
  round 1.5 hole 0.9: 1(-3.5,1.5) 2(-1,1.5) 3(1,1.5) 4(3.5,1.5)
  body extent -6,-9.25 6,3.75, height 6
VibratorMotor [mm]
  rect 1.4x1 smd: 0(-0.1,0)
  rect 4.6x3.4 smd: 0(3,0)
  rect 1.6x1 smd: 1(-0.75,1.6) 2(-0.75,-1.6)
  body extent -1.5,-2.2 10.1,2.2, height 3.6
"WFRSM125 - 3P" [mm]
  rect 2.1x3 smd: 0(-3.8,-1.45) 0(3.8,-1.45)
  rect 0.81x2.5 smd: 1(-1.25,1.45) 2(0,1.45) 3(1.25,1.45)
  body extent -4.29,-2.37 4.03,1.83, height 3.4
"WFRSM125 - 6P" [mm]
  rect 2.1x3 smd: 0(-6.3,-2.9) 0(5.05,-2.9)
  rect 0.81x2.5 smd: 1(-3.75,0) 2(-2.5,0) 3(-1.25,0) 4(0,0) 5(1.25,0) 6(2.5,0)
  body extent -6.79,-3.82 5.46,0.38, height 3.4

## Part data
C1 C2 C4 C5 C6 C13 C14 C15 C86 C87 C88 C89: library part C
C3 C7 C10 C11 C12 C16 C17 C18 C19 C20 C21 C22 C23 C24 C25 C26 C27 C28 C29 C30 C34 C35 C36 C39 C40 C42 C47 C48 C49 C50 C51 C52 C53: library part Cap, "Capacitor"
C8 C9 C32 C33 C38 C41 C43 C44 C64 C66 C85 C90 C91 C92: "Capacitor"
C31: library part "Cap Pol1", "Polarized Capacitor (Radial)"
C37 C54 C55 C56 C57 C58 C59 C60 C61 C62 C63 C67 C68 C69 C70 C71 C72 C73 C74 C75 C76 C77 C79 C80 C83: library part CAP0402-CAP, "<b>Capacitor</b> / Standard 0603 ceramic capacitor, and 0.1\" leaded capacitor."
D1: "Typical RED GaAs LED"
D2 D3 D5 D6: "Typical INFRARED GaAs LED"
E1 E2 E3: "Generic Antenna"
FB1 R1 R9 R10 R13 R14 R15 R16 R17 R18 R19 R20 R21 R22 R25 R26 R27 R28 R29 R30 R31 R34 R35 R36 R37 R38 R39 R40 R41 R42 R43 R44 R45 R46 R47 R48 R50 R51 R52 R53 R54 R55 R56 R57 R59 R60: library part Res2, "Resistor"
FB3 FB6 R3 R11 R23 R24 R32: "Resistor"
L1 L11: library part INDUCTOR
L2 L3 L4 L5 L6 L7 L9: library part Inductor, "Inductor"
MCU1: "STM32 ARM-based 32-bit MCU with 64 Kbytes Flash, 64-pin LQFP, Industrial Temperature"
P1 P2: library part 6PSocket_T
P4: "Connector SMD USB Micro Type B middle mount"
Q1: "PNP Bipolar Transistor"
Q2 Q3: "NPN Bipolar Transistor"
R2 R4 R5 R6 R7 R8 R49 R58: library part R
R12 R33: library part Res*4, "Resistor"
RX2: library part sonar
SW: "Switch"
U5: library part LM4871
X1 Y1: library part OSCILLATOR-3.2X2.5, "Crystal Oscillator in 3.2x2.5 SMD"

## Free pads (board coordinates)
  round 216.54 hole 82.68: 0(0,0) 1(0,-2322.83) 2(1929.13,-2322.83) 3(1929.13,0)

## Via types
v1: diameter 20, hole 12, Top Layer to Bottom Layer, 207 vias
v2: diameter 19.68, hole 11.81, Top Layer to Bottom Layer, 28 vias
v3: diameter 20/20/20 (per signal layer), hole 12, Top Layer to Bottom Layer, 13 vias

## Nets (pads, with @x,y where several pads share a name; then routed paths per layer and width w, separated by ;. In a path a pad name is that pad's centre, name@x,y a point inside that pad or via, vN(x,y) a via of type N, cw(c..) or ccw(c..) an arc to the next point about the centre after c; other vN are vias at no path point)
3.3: C34.2 FB3.1 FB6.1 U2.5 | length 1344.3
  Signal Layer 1 w10: v1(441.12,-811.71) 443.17,-809.67 443.17,-710.67 473,-680.83 694,-680.83 710,-664.83 710,-340.83 766,-284.83 950,-284.83 v1(955,-289.83)
  Bottom Layer w10: v1@958,-286.83 FB3.1@979.31,-286.83
  Bottom Layer w20: FB6.1@238,-625.52 266,-653.52 266,-740.83 320.5,-795.34 U2.5@441.12,-795.34 v1(441.12,-811.71)
3.3NRF: C3.2 C17.2 C39.2 FB3.2 Q1.2 R3.1 U3.8 U3.19 U3.22 | length 1530
  Signal Layer 1 w10: v1(1291,-650.83) 1324.17,-650.83 1370,-605 1370,-468.83 v1(1337,-435.83)
  Bottom Layer w6: C39.2@1048.94,-354.06 1129.35,-354.06 ; C3.2@1177.62,-374.38 1149.66,-374.38 1129.35,-354.06 ; v1(1337,-435.83) 1255.23,-354.06 1129.35,-354.06
  Bottom Layer w10: Q1.2@711.03,-353.57 682.31,-382.29 R3.1@682.31,-403.38 716.76,-437.83 820,-437.83 852,-405.83 997.17,-405.83 C39.2@1048.62,-354.38 ; FB3.2@1019,-286.83 1048.62,-316.46 C39.2@1048.62,-354.38 ; U3.19@1104.41,-427.72 1104.41,-410.17 C39.2@1048.62,-354.38 ; U3.22@1163.46,-427.72 1163.46,-388.54 C3.2@1177.62,-374.38 ; U3.8@1183.15,-593.07 1183.15,-618.91 C17.2@1200.62,-636.38 1200.62,-644.46 1215,-658.83 1283,-658.83 v1(1291,-650.83)
ADC1: P1.2 R33.1 | length 776.7
  Top Layer w10: v1(38,-530.83) 74,-566.83 74,-904.83 262.31,-1093.15 262.31,-1134.56 266.53,-1138.77 R33.1@266.53,-1159.39
  Bottom Layer w10: v1(38,-530.83) 79.59,-530.83 P1.2@88,-522.43
ADC2: P1.5 R33.2 | length 940.6
  Top Layer w10: v1(40.05,-374.79) 13,-401.83 13,-547.83 58,-592.83 58,-911.46 246.31,-1099.78 246.31,-1158.87 R33.2@246.84,-1159.39
  Bottom Layer w10: v1(40.05,-374.79) P1.5@88,-374.79
ADC3: P2.2 R33.3 | length 2327.8
  Top Layer w10: v1(152,-1064.83) 227.16,-1139.99 R33.3@227.16,-1159.39
  Signal Layer 1 w10: v1(152,-1064.83) 156,-1064.83 262,-958.83 v1(342,-958.83)
  Bottom Layer w10: v1(342,-958.83) 683.67,-958.83 753.67,-888.83 1037.7,-888.83 1052.58,-873.95 1688.84,-873.95 1688.84,-470 1766.26,-392.57 P2.2@1839,-392.57
ADC4: P2.5 R33.4 | length 2147.3
  Top Layer w10: v1(152,-1094.83) 207.47,-1150.31 R33.4@207.47,-1159.39
  Signal Layer 1 w10: v1(152,-1094.83) 265,-981.83 v1(380,-981.83)
  Bottom Layer w10: v1(380,-981.83) 382,-979.83 685.3,-979.83 756.35,-908.79 1683.05,-908.79 1704.84,-887 1704.84,-642.88 1785.23,-562.48 1816.73,-562.48 P2.5@1839,-540.21
ADC5: P5.2 R12.2 R43.2 R45.1 | length 2179.1
  Top Layer w10: v1(-19,-1420.83) -3.68,-1436.16 R12.2@34.39,-1436.16
  Bottom Layer w10: v1(-19,-1420.83) -19,-1321.83 160,-1142.83 663,-1142.83 766,-1039.83 1736.48,-1039.83 R45.1@1754,-1022.32 1771.32,-1005 ; R43.2@1754,-987 1771.32,-1004.32 1771.32,-1005 ; P5.2@1844.91,-1005 1771.32,-1005
ADC6: C61.2 R12.3 R25.1 R46.2 | length 117.2
  Top Layer w10: R25.1@-54.84,-1427.84 -54.84,-1455.84 R12.3@34.39,-1455.84
ADC7: P6.2 R12.4 R50.2 R51.1 | length 912.7
  Top Layer w10: R12.4@34.39,-1475.53 3,-1506.92 3,-1526.53 -9.3,-1538.83 -64.7,-1538.83 -83.7,-1519.83 -83.7,-1071.53 v1(51,-936.83)
  Bottom Layer w10: P6.2@94.09,-944 R50.2@172,-944 R51.1@172,-911.69
AGND: C45.2 C46.2 C54.2 C55.2 C56.2 C57.2 C58.2 C59.2 C60.2 C71.1 C72.2 C77.1 C79.1 C80.1 C83.1 MCU1.12 P1.0 P1.3 P1.6 P2.0 P2.3 P2.6 P5.0 P5.3 P6.0 P6.3 R34.1 R45.2 R51.2 | length 2965
  Top Layer w10: v1(166.15,-470.69) 166.15,-380.69 v1(168,-378.83) ; MCU1.12@345.1,-1286.5 v1@345.1,-1224.58 ; v1(347.75,-1224.58) v1@345.1,-1224.58 ; R34.1@373,-1052.15 C45.2@373,-1105 360.68,-1117.32 C71.1@360.68,-1209 v1@345.1,-1224.58 ; v1(760,-935) 766,-935 C72.2@766,-907 ; v1(1766,-536.83) 1780.95,-521.88 v1(1780.95,-441.79) ; v1(1893,-441.83) 1945,-441.83 v1(1948,-444.83)
  Bottom Layer w10: P6.3@88.09,-888.79 155.21,-888.79 R51.2@172,-872 ; v1(166.15,-470.69) C83.1@181,-470.69 ; C57.2@173,-1243 173,-1269.83 198,-1294.83 277,-1294.83 C56.2@306.5,-1324.33 ; C80.1@211,-944.32 216.52,-944.32 233.23,-927.61 ; C60.2@298,-1493.83 C58.2@298,-1426.83 298,-1332.83 C56.2@306.5,-1324.33 ; v1(347.75,-1224.58) 306.5,-1265.83 C56.2@306.5,-1324.33 ; v1(1780.95,-441.79) P2.3@1839,-441.79 v1@1893.21,-441.79 ; v1(1893,-441.83) v1@1893.21,-441.83
  Bottom Layer w20: R51.2@180.89,-875.27 233.23,-927.61 265.62,-960.01 357.45,-1051.83 v1(364,-1051.83) 643,-1051.83 v1@759.92,-934.92 ; v1@765.05,-929.79 1696.42,-929.79 1751.06,-875.15 C79.1@1754,-875.15
ANT1: C38.2 MCU1.38 U6.3 | length 1498
  Top Layer w10: MCU1.38@364.79,-1723.5 364.79,-1678.75 367,-1676.53 367,-1659.14 364.79,-1656.92 364.79,-1569.05 v1@373,-1560.83
  Signal Layer 1 w10: v1(362,-355.83) 369,-362.83 369,-408.51 333,-444.51 333,-905.14 401,-973.14 401,-990.53 391,-1000.53 391,-1054.53 369,-1076.53 v1(369,-1560.83)
  Bottom Layer w8: C38.2@387.75,-342.25 U6.3@387.75,-307.63
  Bottom Layer w10: v1(362,-355.83) 375.46,-342.38 C38.2@387.62,-342.38
ANT2: C32.2 MCU1.39 U6.6 | length 1643.9
  Top Layer w10: MCU1.39@384.47,-1723.5 384.47,-1575.06 390,-1569.53 390,-1543.83 v1(395,-1538.83)
  Signal Layer 1 w10: v1(366,-199.83) 395,-228.83 395,-405.14 372,-428.14 372,-480.36 405,-513.36 405,-659.53 385.17,-679.37 385.17,-834.63 410,-859.46 410,-885.53 407,-888.53 407,-956.51 417,-966.51 417,-997.16 407,-1007.16 407,-1526.83 v1(395,-1538.83)
  Bottom Layer w6: C32.2@380.62,-193.38 cw(c363.42,-210.58) 387.75,-210.58 U6.6@387.75,-239.13
ANT3: C44.2 MCU1.40 U6.7 | length 1667.4
  Top Layer w10: MCU1.40@404.16,-1723.5 405,-1722.66 405,-1577.16 406,-1576.16 406,-1558.83 v1(427,-1537.83)
  Signal Layer 1 w10: v1(427,-1537.83) 427,-1065.53 470,-1022.53 470,-896.83 401.17,-828 401.17,-716.3 421,-696.47 421,-506.73 420.78,-506.51 420.78,-457.74 427,-451.52 427,-203.83 v1(436,-194.83)
  Bottom Layer w6: U6.7@403.5,-239.13 403.5,-222.8 cw(c443.04,-222.8) C44.2@415.08,-194.83
  Bottom Layer w10: C44.2@415.08,-194.83 v1(436,-194.83)
BEEP_EN: MCU1.4 R52.1 U5.1 | length 1075.6
  Top Layer w10: v1(483,-1340.83) 487,-1340.83 502.58,-1325.25 MCU1.4@502.58,-1286.5 ; U5.1@1042,-881.7 1092,-931.7 R52.1@1092,-957.32 1132,-997.32 v1(1132,-1070)
  Bottom Layer w10: v1(483,-1340.83) 527.84,-1295.99 702.01,-1295.99 803,-1195 803,-1154 861,-1096 1106,-1096 v1(1132,-1070)
CE: MCU1.30 U3.1 | length 2108
  Top Layer w10: MCU1.30@195.5,-1613.27 241.57,-1613.27 v1(264,-1590.83)
  Signal Layer 1 w10: v1(264,-1590.83) 273,-1581.83 683.15,-1581.83 721.15,-1543.83 822.37,-1543.83 1155,-1211.21 1155,-1210.63 1192,-1173.63 1192,-914.74 1155,-877.74 1155,-685.04 1142,-672.04 1142,-583.42 1155,-570.42 1155,-526.56 1168.55,-513.02 1212.4,-513.02 1244.58,-480.83 1245,-480.83 1269,-456.83 v1(1309,-456.83)
  Bottom Layer w10: U3.1@1236.3,-461.18 1236.3,-458.83 v1@1307,-458.83
CRX: C22.2 C52.1 Q2.3 R3.2 R24.1 U4.15 U4.16 | length 513.4
  Bottom Layer w10: C22.2@461.65,-382.46 C52.1@493.34,-382.46 ; U4.15@467.21,-423.07 C22.2@467.21,-388.02 ; U4.16@486.9,-423.07 486.9,-388.9 C52.1@493.34,-382.46 ; C52.1@493.65,-382.14 C52.1@493.34,-382.46 ; R24.1@807.62,-291.69 807.62,-300 700.19,-300 Q2.3@644.62,-355.57 642.62,-357.57 R3.2@642.62,-403.38 640.17,-405.83 516.71,-405.83 C52.1@493.34,-382.46
CSN: MCU1.33 U3.2 | length 2074.4
  Top Layer w10: v1(262,-1659.83) 266.36,-1664.2 MCU1.33@266.36,-1723.5
  Signal Layer 1 w10: v1(262,-1659.83) 262,-1634.83 299,-1597.83 791,-1597.83 1171,-1217.83 1171,-1217.25 1208,-1180.25 1208,-908.12 1171,-871.12 1171,-678.42 1158,-665.42 1158,-590.05 1251.21,-496.83 1277,-496.83 v1(1294,-479.83)
  Bottom Layer w10: U3.2@1237.31,-479.83 v1(1294,-479.83)
DAC: C73.2 R12.1 | length 995
  Top Layer w6: R12.1@34.39,-1416.47 34.39,-1297.44 168,-1163.83 v1(170,-1163.83) ; C73.2@747,-1054 747,-1089 v1(768,-1110)
  Bottom Layer w6: v1(170,-1163.83) 691,-1163.83 714.17,-1163.83 v1(768,-1110)